# Altium PCB EVB_CBDR_AK376xE_V1.0.1.PcbDoc (part 2 of 2)
Units mil, origin at the board's own origin, x right, y up, seen from the top; angles counter-clockwise.
Board outline 1970 x 2130.01 mil, 4 copper layers (Top, Inner Layer 2, Inner Layer 3, Bottom), stack 35.4 mil thick; 164 components, 157 nets, 670 pads, 755 vias.
Unrouted connection lines stored in the file: 527.
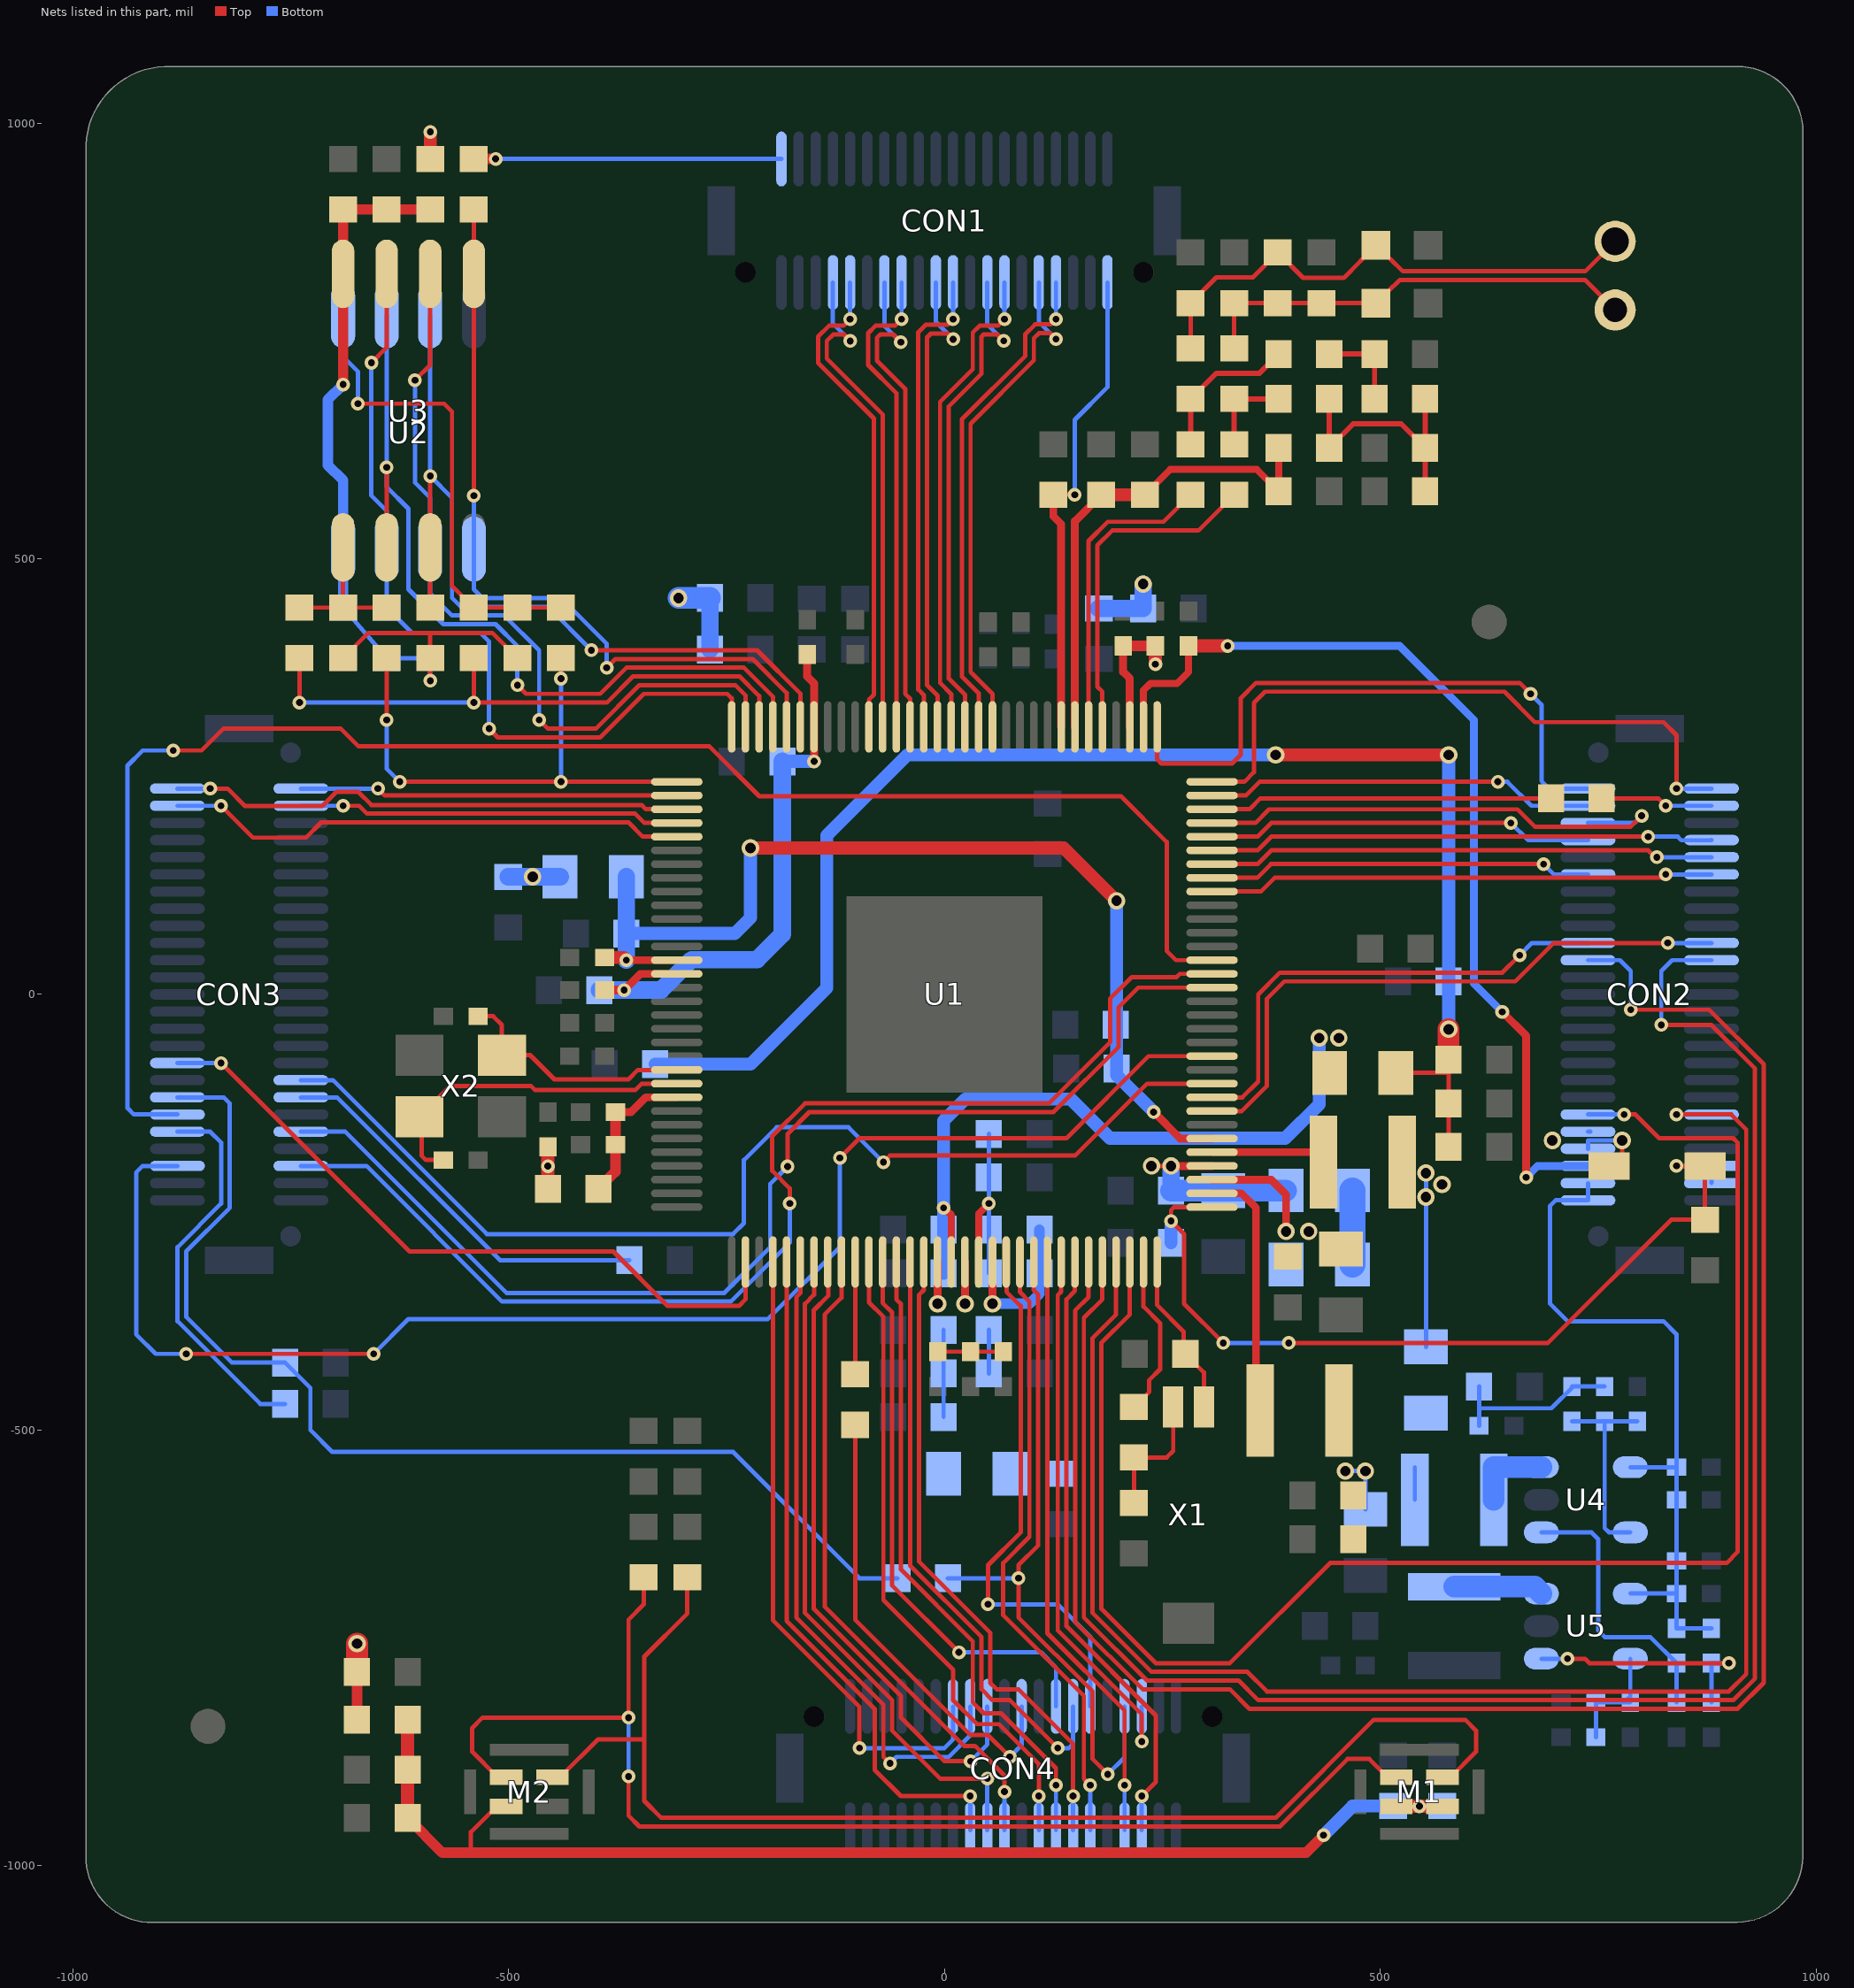
[diagram p3: the nets of this part, all layers, seen from the top]

## Via types
v1: diameter 15.75, hole 7.87, Top to Bottom, 695 vias
v2: diameter 20, hole 12, Top to Bottom, 60 vias

## Nets (pads, with @x,y where several pads share a name; then routed paths per layer and width w, separated by ;. In a path a pad name is that pad's centre, name@x,y a point inside that pad or via, vN(x,y) a via of type N, cw(c..) or ccw(c..) an arc to the next point about the centre after c; other vN are vias at no path point) (continued)
LCD_RST: CON3.33 U1.34 | length 813.3
  Top w5: v1(-830,-78.74) -613.74,-295 -380,-295 -317.5,-357.5 -235.85,-357.5 -228.35,-350 U1.34@-228.35,-307.09
  Bottom w5: CON3.33@-880.12,-78.74 -877.5,-78.74 v1(-830,-78.74)
LED_CON: CON3.36 U1.74 | length 1265.7
  Top w5: v1(-70,-192.5) -62.5,-185 150,-185 232.64,-102.36 U1.74@307.09,-102.36
  Bottom w5: CON3.36@-738.38,-98.43 -735,-98.43 -701.57,-98.43 -525,-275 -242.5,-275 -230,-262.5 -230,-190 -192.5,-152.5 -110,-152.5 v1(-70,-192.5)
LED_STATE: CON3.46 U1.82 | length 1395.1
  Top w5: v1(-177.5,-240) -177.5,-222.5 -197.5,-202.5 -197.5,-162.5 -160,-125 120,-125 190,-55 190,-5 215,20 266.38,20 270,23.62 U1.82@307.09,23.62
  Bottom w5: CON3.46@-738.38,-196.85 -663.15,-196.85 -507.5,-352.5 -245,-352.5 -177.5,-285 v1(-177.5,-240)
MIC_N: C19.1 U1.102 | length 352.4
  Top w5: U1.102@165.35,307.09 165.35,520.35 187.5,542.5 251.5,542.5 C19.1@282.5,573.5
MIC_P: C16.1 U1.101 | length 391.8
  Top w5: U1.101@181.1,307.09 181.1,347.5 175.5,353.1 175.5,515.5 192.5,532.5 291.5,532.5 C16.1@332.5,573.5
MIPI_DSI_TXDN0: CON1.8 U1.110 | length 573.3
  Top w5: U1.110@39.37,307.09 39.37,345.63 20,365 20,660 92.5,732.5 92.5,757.5 104,769 121.95,769 v1(127.95,775)
  Bottom w5: v1(127.95,775) CON1.8@127.95,817.12
MIPI_DSI_TXDN1: CON1.14 U1.112 | length 558.3
  Top w5: U1.112@7.87,307.09 7.87,344.63 -5,357.5 -5,680 32.5,717.5 32.5,759.63 40.37,767.5 61.4,767.5 v1(68.9,775)
  Bottom w5: v1(68.9,775) CON1.14@68.9,817.12
MIPI_DSI_TXDN2: CON1.20 U1.114 | length 543.7
  Top w5: U1.114@-23.62,307.09 -23.62,343.62 -30,350 -30,760 -21.5,768.5 3.34,768.5 v1(9.84,775)
  Bottom w5: v1(9.84,775) CON1.20@9.84,817.12
MIPI_DSI_TXDN3: CON1.26 U1.116 | length 552.4
  Top w5: U1.116@-55.12,307.09 -55.12,339.38 -55.12,690.12 -87.5,722.5 -87.5,759 -79,767.5 -56.71,767.5 v1(-49.21,775)
  Bottom w5: v1(-49.21,775) CON1.26@-49.21,817.12
MIPI_DSI_TXDN4: CON1.32 U1.118 | length 563.9
  Top w5: v1(-108.27,775) -115.77,767.5 -132.5,767.5 -145,755 -145,725 -81,661 -81,344 -86.61,338.39 U1.118@-86.61,307.09
  Bottom w5: v1(-108.27,775) CON1.32@-108.27,817.12
MIPI_DSI_TXDP0: CON1.10 U1.109 | length 590.1
  Top w5: U1.109@55.12,307.09 55.12,342.5 55.12,345 30,370.12 30,655 102.62,727.62 102.62,753 108.62,759 121.27,759 v1(128,752.27)
  Bottom w5: CON1.10@108.27,817.12 108.27,772 v1(128,752.27)
MIPI_DSI_TXDP1: CON1.16 U1.111 | length 575.4
  Top w5: U1.111@23.62,307.09 23.62,341.38 23.62,343.88 5,362.5 5,675 42.5,712.5 42.5,755 45,757.5 60.71,757.5 v1(68,750.21)
  Bottom w5: CON1.16@49.21,817.12 49.21,769 v1(68,750.21)
MIPI_DSI_TXDP2: CON1.22 U1.113 | length 559.8
  Top w5: U1.113@-7.87,307.09 -7.87,340.37 -7.87,342.87 -20,355 -20,754 -15.5,758.5 3.5,758.5 v1(10,752)
  Bottom w5: CON1.22@-9.84,817.12 -9.84,772 10,752.16 v1(10,752)
MIPI_DSI_TXDP3: CON1.28 U1.115 | length 571.4
  Top w5: v1(-50,748.6) -58.9,757.5 -73.5,757.5 -77.5,753.5 -77.5,727.5 -45,695 -45,345 -39.37,339.37 U1.115@-39.37,307.09
  Bottom w5: CON1.28@-68.9,817.12 -68.9,767.5 v1(-50,748.6)
MIPI_DSI_TXDP4: CON1.34 U1.117 | length 578.1
  Top w5: v1(-108,750) -115.5,757.5 -127.5,757.5 -135,750 -135,730 -70.87,665.87 U1.117@-70.87,307.09
  Bottom w5: CON1.34@-127.95,817.12 -127.95,769.95 v1(-108,750)
NETC9_1: C9.1 C10.1 C11.1 C12.1 FB3.2 M1.1 M1.2 M2.1 | length 1411.8
  Top w5: -543.27,-985 -543.27,-961.27 -513.73,-931.73 M2.1@-502.85,-931.73
  Top w12: C11.1@-616,-945 -576,-985 -543.27,-985 415,-985 v1(435,-965)
  Top w15: C11.1@-616,-945 C12.1@-616,-890 FB3.2@-616,-832.5 ; M1.1@518.43,-931.73 v1(545,-931.73) M1.2@571.57,-931.73
  Bottom w15: v1(435,-965) 468.5,-931.5 C10.1@515,-931.5
NETC14_1: C14.1 C15.1 C17.1 R5.1 R6.2 | length 294.8
  Top w6: R6.2@441.5,683.5 R5.1@441.5,627.5 469,655 524,655 C15.1@551.5,627.5 ; C14.1@551.5,577.5 C15.1@551.5,627.5 ; C17.1@551.5,683.5 C15.1@551.5,627.5
NETC16_2: C16.2 FB4.1 R6.1 | length 103
  Top w6: C16.2@332.5,631.5 FB4.1@332.5,683.5 R6.1@383.5,683.5
NETC17_2: C17.2 R7.1 R8.2 | length 103.5
  Top w6: R7.1@441.5,735 R8.2@493.5,735 C17.2@493.5,683.5
NETC18_1: C18.1 C20.1 C22.1 E1.1 FB4.2 MIC1.1 | length 514
  Top w5: FB4.2@332.5,741.5 C20.1@332.5,793.5 C18.1@382.5,793.5 C22.1@432.5,793.5 E1.1@495,793.5 522.5,820 735.16,820 MIC1.1@769.53,785.63
NETC18_2: C18.2 C21.1 E2.1 FB5.2 MIC1.2 | length 617.3
  Top w5: FB5.2@282.5,741.5 C21.1@282.5,793.5 312,823 354,823 C18.2@382.5,851.5 411.5,822.5 458.5,822.5 E2.1@495,860 526,830 735.16,830 MIC1.2@769.53,864.37
NETC19_2: C19.2 FB5.1 R7.2 | length 174.3
  Top w6: C19.2@282.5,631.5 FB5.1@282.5,683.5 312,713 361.5,713 R7.2@383.5,735
NETC41_1: C41.1 C48.1 R24.1 U1.67 | length 134.4
  Top w9: U1.67@307.09,-212.6 374.9,-212.6 ; 375,-212.5 374.9,-212.6 ; v2(392,-272) 392,-229.7 374.9,-212.6
  other v2: 418,-272
NETC42_1: C42.1 C43.1 R13.1 U1.68 | length 229.7
  Top w5: v2(237.5,-196.85) v2(260,-196.85)
  Top w9: v2(260,-196.85) U1.68@307.09,-196.85
  Bottom w20: C43.1@260,-225 v2(260,-196.85)
  Bottom w25: C43.1@260,-225 C42.1@320,-225 R13.1@392,-225
NETC69_1: C69.1 R31.1 X1.2 | length 150.7
  Top w5: C69.1@217.5,-583.5 R31.1@217.5,-531.5 255,-531.5 262.5,-524 262.5,-473.7 X1.2@262.28,-473.48
NETC87_1: C87.1 R37.1 U4.1 | length 323.7
  Bottom w5: U4.1@685,-617.4 742.4,-617.4 750,-625 750,-730 757.5,-737.5 810,-737.5 R37.1@840,-767.5 C87.1@840,-812.5
NETC90_1: C90.1 R38.1 U5.1 | length 282.1
  Top w5: v1(715,-762.4) 734.9,-762.4 740,-767.5 v1(900,-767.5)
  Bottom w5: U5.1@685,-762.4 v1(715,-762.4) ; C90.1@880,-812.5 R38.1@880,-767.5 v1(900,-767.5)
NETC92_2: C92.2 R41.1 R42.2 U4.5 | length 228.9
  Bottom w5: C92.2@720,-490 R41.1@757.5,-490 ; U4.5@786.97,-617.4 762.5,-617.4 757.5,-612.4 R41.1@757.5,-490 ; R42.2@795,-490 R41.1@757.5,-490
NETC93_2: C93.2 R39.2 R40.1 U5.5 | length 139.4
  Bottom w5: R40.1@747.5,-852.5 C93.2@747.5,-812.5 R39.2@786.97,-812.5 780,-812.5 786.97,-805.53 U5.5@786.97,-762.4
NETCON1_39: CON1.39 R4.1 | length 353.1
  Top w12: R4.1@-540,959 v1(-515,959)
  Bottom w5: v1(-515,959) -250,959 -249.86,958.86 CON1.39@-187.01,958.86
NETL3_1: L3.1 U4.3 | length 92.1
  Bottom w25: L3.1@630.28,-580 630.28,-542.6 U4.3@685,-542.6
NETL4_1: L4.1 U5.3 | length 103.3
  Bottom w25: L4.1@585,-679.72 677.12,-679.72 U5.3@685,-687.6
NETR2_2: R2.2 R25.1 R26.1 U2.1 | length 555
  Top w5: v1(-673,678) -574,678 -565,669 -565,469 R26.1@-540,444 R2.2@-490,444 R25.1@-440,444
  Bottom w5: U2.1@-690,778.86 -690,732 -673,715 v1(-673,678)
NETR19_2: R19.2 R27.1 R28.1 U3.1 | length 169
  Top w5: R27.1@-740,444 R19.2@-690,444 ; U3.1@-690,513 R19.2@-690,444 ; R28.1@-640,444 R19.2@-690,444
NETR35_1: R35.1 U1.42 | length 128.9
  Top w5: R35.1@-102.36,-436 U1.42@-102.36,-307.09
NETR36_2: R36.2 U1.94 | length 394.1
  Top w5: U1.94@307.09,212.6 350.1,212.6 362.5,225 R36.2@696,225
PDM_CLK: M1.3 M2.3 R20.1 | length 1489
  Top w5: M2.3@-449.71,-898.27 -448.94,-897.5 -440,-897.5 -397.5,-855 -344.5,-855 ; R20.1@-295,-669 -295,-710.5 -344.5,-760 -344.5,-855 ; M1.3@571.57,-898.27 580.73,-898.27 610,-869 610,-845 597.5,-832.5 492.5,-832.5 380,-945 -325,-945 -344.5,-925.5 -344.5,-855
PDM_DATA: M1.4 M2.4 R22.1 | length 1470.3
  Top w5: M2.4@-502.85,-898.27 -512.73,-898.27 -542,-869 -542,-842 -530,-830 v1(-362.5,-830) -362.5,-717.5 -345,-700 R22.1@-345,-669 ; v1(-362.5,-897.5) -362.5,-942.5 -350,-955 385,-955 462.5,-877.5 487.5,-877.5 508.27,-898.27 M1.4@518.43,-898.27
  Bottom w5: v1(-362.5,-897.5) v1(-362.5,-830)
RGB_VOGATE/MPU_RD: CON3.2 U1.2 | length 434.6
  Top w5: v1(-650,236.22) -642.13,228.35 U1.2@-307.09,228.35
  Bottom w5: CON3.2@-738.38,236.22 -735,236.22 v1(-650,236.22)
RGB_VOHSYNC/MPU_CS: CON3.4 U1.4 | length 439.5
  Top w5: v1(-690,216.54) -671.54,216.54 -662.5,207.5 -355,207.5 -344.35,196.85 U1.4@-307.09,196.85
  Bottom w5: CON3.4@-738.38,216.54 v1(-690,216.54)
RGB_VOPCLK/MPU_WR: CON3.3 U1.5 | length 602.2
  Top w5: v1(-830,216.54) -793.46,180 -732.5,180 -715,197.5 -362.5,197.5 -346.1,181.1 U1.5@-307.09,181.1
  Bottom w5: CON3.3@-880.12,216.54 -880,216.54 v1(-830,216.54)
RGB_VOVSYNC/MPU_A0: CON3.1 U1.3 | length 596.3
  Top w5: v1(-842.5,236.22) -822.5,236.22 -802.5,216.22 -713.78,216.22 -697.5,232.5 -672.5,232.5 -657.5,217.5 -387.6,217.5 -347.5,217.5 -342.6,212.6 U1.3@-307.09,212.6
  Bottom w5: CON3.1@-880.12,236.22 -875,236.22 v1(-842.5,236.22)
RMII0_50MCLK: CON4.22 R35.2 | length 529.7
  Top w5: R35.2@-102.36,-494 -102.36,-717.64 30,-850 50,-850 v1(75,-875)
  Bottom w5: v1(75,-875) 88.58,-861.42 CON4.22@88.58,-817.12
RMII0_MDC: CON4.15 U1.37 | length 785.6
  Top w5: U1.37@-181.1,-307.09 -181.1,-718.9 -80,-820 -80,-890 -50,-920 v1(29.53,-920)
  Bottom w5: CON4.15@29.53,-958.86 v1(29.53,-920)
RMII0_MDIO: CON4.14 U1.36 | length 748.5
  Top w5: U1.36@-196.85,-307.09 -196.85,-718.15 -97.5,-817.5 v1(-97.5,-865)
  Bottom w5: v1(-97.5,-865) 0,-865 9.84,-855.16 CON4.14@9.84,-817.12
RMII0_RST: CON2.11 U1.61 | length 1961.8
  Top w5: U1.61@196.85,-307.09 196.85,-367.5 170,-394.35 170,-710 237.5,-777.5 347.5,-777.5 370,-800 900,-800 920,-780 920,-155 902.8,-137.8 v1(840,-137.8)
  Bottom w5: v1(840,-137.8) CON2.11@880.12,-137.8
RMII0_RXD0: CON4.18 U1.40 | length 743
  Top w5: U1.40@-133.86,-307.09 -133.35,-307.6 -133.35,-345.85 -150,-362.5 -150,-705 -50,-805 -50,-830 0,-880 v1(30,-880)
  Bottom w5: v1(30,-880) 49.21,-860.79 CON4.18@49.21,-817.12
RMII0_RXD1: CON4.19 U1.41 | length 752.6
  Top w5: U1.41@-118.11,-307.09 -118.11,-348.11 -137.5,-367.5 -137.5,-702.5 22.5,-862.5 35,-862.5 68.9,-896.4 v1(68.9,-915)
  Bottom w5: CON4.19@68.9,-958.86 v1(68.9,-915)
RMII0_RXDV: CON4.17 U1.39 | length 774.5
  Top w5: U1.39@-149.61,-307.09 -149.61,-344.61 -160,-355 -160,-710 -60,-810 -60,-845 -5,-900 v1(49.21,-900)
  Bottom w5: CON4.17@49.21,-958.86 v1(49.21,-900)
RMII0_RXER: CON4.16 U1.38 | length 760.5
  Top w5: U1.38@-165.35,-307.09 -165.35,-342.85 -170,-347.5 -170,-715 -70,-815 -70,-875 v1(-62.5,-882.5)
  Bottom w5: v1(-62.5,-882.5) -55,-875 5,-875 29.53,-850.47 CON4.16@29.53,-817.12
RMII0_TXD0: CON4.23 U1.43 | length 747.1
  Top w5: U1.43@-86.61,-307.09 -86.61,-353.39 -70,-370 -70,-695 10,-775 10,-810 37.5,-837.5 62.5,-837.5 108.27,-883.27 v1(108.27,-920)
  Bottom w5: CON4.23@108.27,-958.86 v1(108.27,-920)
RMII0_TXD1: CON4.26 U1.44 | length 647.4
  Top w5: U1.44@-70.87,-307.09 -70.87,-354.13 -60,-365 -60,-678.37 v1(16.63,-755)
  Bottom w5: v1(16.63,-755) 110.45,-755 127.95,-772.5 CON4.26@127.95,-817.12
RMII0_TXEN: CON4.25 U1.45 | length 739.3
  Top w5: U1.45@-55.12,-307.09 -55.12,-349.88 -50,-355 -50,-659.88 32.5,-742.38 32.5,-812.5 45,-825 65,-825 127.95,-887.95 v1(127.95,-907.5)
  Bottom w5: CON4.25@127.95,-958.86 v1(127.95,-907.5)
RMII1_50MCLK/CSI0_D4: CON2.47 R36.1 | length 129.6
  Top w5: R36.1@754,225 819.04,225 v1(827.5,216.54)
  Bottom w5: v1(827.5,216.54) CON2.47@880.12,216.54
RMII1_MDC/CSI0_VSYNC/SD2_D0: CON2.40 U1.89 | length 442.7
  Top w5: U1.89@307.09,133.86 358.86,133.86 374.61,149.61 v1(687.5,149.61)
  Bottom w5: v1(687.5,149.61) 699.31,137.8 CON2.40@738.38,137.8
RMII1_MDIO/CSI0_HSYNC/SD2_D1: CON2.39 U1.88 | length 581.2
  Top w5: U1.88@307.09,118.11 363.11,118.11 378.86,133.86 823.56,133.86 v1(827.5,137.8)
  Bottom w5: v1(827.5,137.8) CON2.39@880.12,137.8
RMII1_RST: CON2.12 U1.62 | length 1875.1
  Top w5: U1.62@212.6,-307.09 212.6,-367.4 180,-400 180,-705 242.5,-767.5 327.5,-767.5 442.5,-652.5 897.5,-652.5 910,-640 910,-170 905,-165 820,-165 792.8,-137.8 v1(780,-137.8)
  Bottom w5: CON2.12@738.38,-137.8 742.5,-137.8 v1(780,-137.8)
RMII1_RXD0/CSI0_D2/SD2_D3: CON2.44 U1.92 | length 446
  Top w5: U1.92@307.09,181.1 359.25,181.1 375,196.85 v1(650,196.85)
  Bottom w5: v1(650,196.85) 669.69,177.17 CON2.44@738.38,177.17
RMII1_RXD1/CSI0_D3/SD2_D2: CON2.46 U1.93 | length 577.8
  Top w5: U1.93@307.09,196.85 356.85,196.85 372.5,212.5 657.5,212.5 677.5,192.5 787.5,192.5 v1(800,205)
  Bottom w5: CON2.46@738.38,196.85 791.85,196.85 v1(800,205)
RMII1_RXDV/CSI0_D1/SD2_CMD: CON2.43 U1.91 | length 581.2
  Top w5: U1.91@307.09,165.35 359.28,165.35 375,181.07 v1(807.5,181.07)
  Bottom w5: v1(807.5,181.07) 841.43,181.07 845.54,176.96 CON2.43@880.12,177.17
RMII1_RXER/CSI0_D0/SD2_CLK: CON2.41 U1.90 | length 582.8
  Top w5: U1.90@307.09,149.61 359.25,149.61 375,165.35 807.5,165.35 815.35,157.5 v1(817.5,157.48)
  Bottom w5: v1(817.5,157.48) CON2.41@880.12,157.48
RMII1_TXD0/CSI0_D5: CON2.48 U1.95 | length 449.2
  Top w5: U1.95@307.09,228.35 345.85,228.35 361.59,244.09 v1(635,244.09)
  Bottom w5: v1(635,244.09) 645.91,244.09 673.46,216.54 CON2.48@738.38,216.54
RMII1_TXD1/CSI0_D6: CON2.49 U1.96 | length 744.5
  Top w5: U1.96@307.09,244.09 344.09,244.09 355,255 355,334.59 367.91,347.5 642.5,347.5 677.5,312.5 825,312.5 840,297.5 v1(840,236.22)
  Bottom w5: v1(840,236.22) CON2.49@880.12,236.22
RMII1_TXEN/CSI0_D7: CON2.50 U1.97 | length 711.3
  Top w5: U1.97@244.09,307.09 244.09,270 249.09,265 330,265 340,275 340,340.01 357.49,357.5 660,357.5 v1(672.5,345)
  Bottom w5: v1(672.5,345) 685,332.5 685,245 693.74,236.26 CON2.50@738.38,236.22
SPI0_CS0: R26.2 R27.2 U1.126 | length 686.6
  Top w5: v1(-740,335) R27.2@-740,386 ; R26.2@-540,386 v1(-540,335) -387.5,335 -357.5,365 -235,365 -212.6,342.6 U1.126@-212.6,307.09
  Bottom w5: v1(-740,335) v1(-540,335)
SPI0_CS1: R25.2 R28.2 U1.1 | length 607.9
  Top w5: v1(-640,315) R28.2@-640,386 ; v1(-625,244.09) v1(-440,244.09) U1.1@-307.09,244.09 ; v1(-440,362.5) R25.2@-440,386
  Bottom w5: v1(-640,315) -640,259.09 v1(-625,244.09) ; v1(-440,244.09) v1(-440,362.5)
SPI0_DIN: U1.125 U2.2 U3.2 | length 971.4
  Top w5: U3.2@-640,513 v1(-640,605) ; v1(-490,355) -480,345 -395,345 -365,375 -230,375 -196.85,341.85 U1.125@-196.85,307.09
  Bottom w5: U2.2@-640,778.86 v1(-640,605) -640,582.5 -615,557.5 -615,465 -575,425 -515,425 -490,400 v1(-490,355)
SPI0_DOUT: R4.2 U1.124 U2.5 U3.5 | length 907.6
  Top w5: v1(-540,572.5) U3.5@-540,827 R4.2@-540,901 ; v1(-387.5,375) -377.5,385 -220,385 -181.1,346.1 U1.124@-181.1,307.09
  Bottom w5: v1(-540,572.5) U2.5@-540,511.14 -540,465 -530,455 -440,455 -387.5,402.5 v1(-387.5,375)
SPI0_HOLD: R3.2 U1.128 U2.7 U3.7 | length 969.4
  Top w5: v1(-657.5,725) -640,742.5 U3.7@-640,827 ; v1(-522.5,305) -512.5,295 -395,295 -345,345 -249.09,345 -244.09,340 U1.128@-244.09,307.09
  Bottom w5: v1(-657.5,725) -657.5,572.5 -640,555 U2.7@-640,511.14 R3.2@-640,444 -611,415 -532.5,415 -522.5,405 v1(-522.5,305)
SPI0_SCLK: U1.127 U2.6 U3.6 | length 916
  Top w5: v1(-607.5,705) -590,722.5 U3.6@-590,827 ; v1(-465,315) -455,305 -400,305 -350,355 -240,355 -228.35,343.35 U1.127@-228.35,307.09
  Bottom w5: v1(-607.5,705) -607.5,587.5 -590,570 U2.6@-590,511.14 -590,460 -565,435 -505,435 -465,395 v1(-465,315)
SPI0_WP: R1.2 U1.123 U2.3 U3.3 | length 968.5
  Top w5: R1.2@-590,444 U3.3@-590,513 v1(-590,595) ; v1(-405,395) -215,395 -165.35,345.35 U1.123@-165.35,307.09
  Bottom w5: U2.3@-590,778.86 v1(-590,595) -565,570 -565,455 -555,445 -455,445 v1(-405,395)
SPI_FLASH_3V3: C1.1 C2.2 C70.1 FB1.1 R1.1 R2.1 R3.1 R19.1 U2.8 U3.8 | length 997.2
  Top w5: R19.1@-690,386 -661,415 -590,415 ; v1(-590,360) R1.1@-590,386 -590,415 ; R2.1@-490,386 -519,415 -590,415
  Top w12: v1(-690,700) U3.8@-690,827 C70.1@-690,901 C1.1@-640,901 FB1.1@-590,901
  Bottom w5: C2.2@-690,444 R3.1@-640,386 -600,386 -590,376 v1(-590,360)
  Bottom w12: C2.2@-690,444 U2.8@-690,511.14 -690,590 -707.5,607.5 -707.5,682.5 v1(-690,700)
SPK_EN: CON3.45 U1.76 | length 1681.6
  Top w5: v1(-870,-412.5) v1(-655,-412.5) ; v1(-120,-187.5) -97.5,-165 140,-165 234.13,-70.87 U1.76@307.09,-70.87
  Bottom w5: CON3.45@-880.12,-196.85 -882.5,-196.85 -920,-196.85 -927.5,-204.35 -927.5,-390 -905,-412.5 v1(-870,-412.5) ; v1(-655,-412.5) -615,-372.5 -202.5,-372.5 -120,-290 v1(-120,-187.5)
SW11: L2.1 U1.69 | length 134.3
  Top w8.5: U1.69@307.09,-181.1 428.33,-181.1 L2.1@434.72,-192.5
SW18: L1.1 U1.66 | length 290.1
  Top w8.5: U1.66@307.09,-228.35 340.85,-228.35 357.5,-245 357.5,-435 L1.1@362.22,-477.5
TF_CLK: CON4.34 R17.2 U1.55 | length 808.6
  Top w5: U1.55@102.36,-307.09 102.36,-339.36 107.5,-344.5 107.5,-632.5 85,-655 v1(85,-670) 85,-715 170,-800 170,-877.5 v1(187.5,-895)
  Bottom w5: R17.2@4,-670 v1(85,-670) ; v1(187.5,-895) 206.69,-875.81 CON4.34@206.69,-817.12
TF_CMD: CON4.33 U1.56 | length 688.5
  Top w5: U1.56@118.11,-307.09 118.11,-733.11 206.69,-821.69 v1(206.69,-907.5)
  Bottom w5: CON4.33@206.69,-958.86 v1(206.69,-907.5)
TF_D0: CON4.29 U1.54 | length 710.1
  Top w5: U1.54@86.61,-307.09 86.61,-341.61 97.5,-352.5 97.5,-622.5 67.5,-652.5 67.5,-712.5 160,-805 160,-900.18 v1(167.32,-907.5)
  Bottom w5: CON4.29@167.32,-958.86 v1(167.32,-907.5)
TF_D1: CON4.30 U1.53 | length 627.9
  Top w5: v1(50,-700) 50,-655 87.5,-617.5 87.5,-357.5 71.25,-341.25 71.25,-307.47 U1.53@70.87,-307.09
  Bottom w5: v1(50,-700) 130,-700 167.32,-737.32 CON4.30@167.32,-817.12
TF_D2: CON4.35 U1.58 | length 704.9
  Top w5: U1.58@149.61,-307.09 149.61,-340.39 140,-350 140,-725 242.5,-827.5 242.5,-903.88 v1(226.38,-920)
  Bottom w5: CON4.35@226.38,-958.86 226.38,-955 v1(226.38,-920)
TF_D3: CON4.36 U1.57 | length 632.3
  Top w5: U1.57@133.86,-307.09 133.86,-341.14 130,-345 130,-730 226.38,-826.38 v1(226.38,-857.5)
  Bottom w5: v1(226.38,-857.5) CON4.36@226.38,-817.12
TF_DET: CON3.37 R17.1 R29.1 | length 1297.4
  Bottom w5: CON3.37@-880.12,-118.11 -877.5,-118.11 -826.89,-118.11 -820,-125 -820,-245 -870,-295 -870,-370 -817.5,-422.5 R29.1@-756.5,-422.5 -727.5,-451.5 -727.5,-500 -702.5,-525 -242.5,-525 -97.5,-670 R17.1@-54,-670
TF_EN: CON3.39 U1.83 | length 1898.7
  Top w5: v1(-885,280) -852.5,280 -827.5,305 -692.5,305 -672.5,285 -270,285 -212.5,227.5 202.5,227.5 255,175 255,50 265.63,39.37 U1.83@307.09,39.37
  Bottom w5: v1(-885,280) -920,280 -937.5,262.5 -937.5,-130.3 -930,-137.8 CON3.39@-880.12,-137.8
TS_INT: CON2.32 U1.73 | length 563.3
  Top w5: U1.73@307.09,-118.11 341.89,-118.11 360,-100 360,0 385,25 640,25 v1(660,45)
  Bottom w5: v1(660,45) 674.06,59.06 CON2.32@738.38,59.06
TS_RST: CON2.31 U1.72 | length 720.1
  Top w5: U1.72@307.09,-133.86 341.14,-133.86 370,-105 370,-5 390,15 655,15 699.06,59.06 832.5,59.06 830,56.56 v1(830,59.06)
  Bottom w5: v1(830,59.06) CON2.31@880.12,59.06
TS_SCL: CON2.30 U1.59 | length 2250.2
  Top w5: U1.59@165.35,-307.09 165.35,-347.5 150,-362.85 150,-720 227.5,-797.5 327.5,-797.5 350,-820 910,-820 940,-790 940,-80 877.5,-17.5 v1(787.5,-17.5)
  Bottom w5: CON2.30@738.38,39.37 775,39.37 787.5,26.87 v1(787.5,-17.5)
TS_SDA: CON2.29 U1.60 | length 2189.2
  Top w5: U1.60@181.1,-307.09 181.1,-350 160,-371.1 160,-715 232.5,-787.5 337.5,-787.5 360,-810 905,-810 930,-785 930,-85 880,-35 v1(822.5,-35)
  Bottom w5: v1(822.5,-35) 822.5,26.87 835,39.37 CON2.29@880.12,39.37
UART0_RXD: CON4.27 U1.47 | length 741.8
  Top w5: U1.47@-23.62,-307.09 -23.62,-339.12 -29,-344.5 -29,-651 52.5,-732.5 52.5,-790 60,-797.5 85,-797.5 147.64,-860.14 v1(147.64,-920)
  Bottom w5: CON4.27@147.64,-958.86 v1(147.64,-920)
UART0_TXD: CON4.28 U1.46 | length 702.4
  Top w5: U1.46@-39.37,-307.09 -39.37,-655.63 42.5,-737.5 42.5,-797.5 55,-810 75,-810 v1(130,-865)
  Bottom w5: v1(130,-865) 142.64,-865 147.64,-860 CON4.28@147.64,-817.12
VCC_3V6: C84.1 C85.1 C86.1 C89.1 CON2.2 CON2.4 R37.2 R38.2 U4.4 U5.4 | length 821.2
  Bottom w5: CON2.4@738.38,-216.54 CON2.2@738.38,-236.22 701.28,-236.22 695,-242.5 695,-355 715,-375 825,-375 840,-390 C86.1@840,-542.6 ; U5.4@786.97,-687.6 C85.1@840,-687.6 ; U4.4@786.97,-542.6 C86.1@840,-542.6 ; R38.2@880,-727.5 R37.2@840,-727.5 C85.1@840,-687.6 ; C85.1@840,-687.6 C84.1@840,-650 C89.1@840,-580 C86.1@840,-542.6
VCC_RTC: C51.1 C52.1 CON2.3 CON2.5 D1.K U1.65 | length 1019.7
  Top w5: U1.65@307.09,-244.09 263.41,-244.09 260,-247.5 v1(260,-260) 275,-275 275,-355 v1(320,-400) ; v1(395,-400) 692.5,-400 834,-258.5 C51.1@872.62,-258.5 D1.K@872.62,-196.85 865.12,-201.85 860.12,-196.85 v1(840,-196.85)
  Bottom w5: v1(320,-400) v1(395,-400) ; v1(840,-196.85) CON2.5@880.12,-196.85 880.12,-215 CON2.3@880.12,-216.54
  Bottom w15: C52.1@260,-285 v1(260,-260)
VCM3: C13.1 C65.1 C66.1 R5.2 U1.103 | length 554.9
  Top w8: C66.1@230,573.5 259,602.5 358.5,602.5 C13.1@383.5,577.5 R5.2@383.5,627.5
  Top w9: U1.103@149.61,307.09 149.61,543.11 C65.1@180,573.5
  Top w15: C65.1@180,573.5 C66.1@230,573.5
VCM_RESET: C50.1 CON1.2 U1.104 | length 553.7
  Top w5: C50.1@125,573.5 v1(149.5,573.5)
  Top w9: C50.1@125,573.5 125,548.86 133.86,540 U1.104@133.86,307.09
  Bottom w5: v1(149.5,573.5) 149.5,659.5 187.01,697.01 CON1.2@187.01,817.12
VDD: C88.1 C92.1 C94.1 L3.2 R41.2 R43.2 | length 237.9
  Bottom w5: L3.2@539.72,-580 L3.2@539.72,-542.78 ; C88.1@613.5,-495 613.5,-475 ; C94.1@613.5,-450 613.5,-475 ; C92.1@720,-450 C92.1@721.32,-450 ; R41.2@757.5,-450 C92.1@721.32,-450 ; 613.5,-475 696.32,-475 C92.1@721.32,-450
VDD_1V1: C36.2 C46.1 C47.1 C53.1 FB6.1 L2.2 R11.1 R43.1 | length 1870.1
  Top w5: R11.1@518,-90 C53.1@578.5,-90 ; C47.1@578.5,-175 C36.2@578.5,-125 C53.1@578.5,-90 ; C53.1@578.5,-75 C53.1@578.5,-90
  Top w15: v2(380,275) v2(578.5,275)
  Top w25: C53.1@578.5,-75 v2(578.5,-40)
  Bottom w5: R43.1@552.5,-404.5 v2(552.5,-232.5) v2(552.5,-205)
  Bottom w15: FB6.1@-332,-80 -222.5,-80 -135,7.5 -135,182.5 -42.5,275 v2(380,275) ; v2(578.5,-40) C46.1@578.5,15 v2(578.5,275)
  other v2: 571,-218
VDD_1V8: C28.2 C44.1 C45.1 L1.2 R10.1 R44.1 | length 67
  Bottom w5: v2(460,-547) v2(483,-547) R44.1@483,-591
VDD_3V3: C5.2 C8.1 C40.2 C56.1 C59.1 CON2.8 CON2.10 D1.A FB1.2 FB2.1 FB3.1 FB7.1 FB8.1 R12.1 R13.2 R24.2 | length 580.9
  Top w5: D1.A@762.38,-196.85 777.5,-196.85 v2(777.5,-167.5)
  Top w12: FB3.1@-674,-832.5 C8.1@-674,-777.5
  Top w15: FB1.2@-590,959 v1(-590,990) ; FB7.1@-455,-223 v1(-455,-197) C40.2@-455,-175
  Top w25: C8.1@-674,-777.5 v2(-674,-745)
  Bottom w5: CON2.8@738.38,-177.17 738.38,-167.5 v2(777.5,-167.5) ; CON2.10@738.38,-157.48 CON2.10@741,-157.48
  Bottom w20: C59.1@-500.5,135 v2(-472.5,135) R12.1@-441,135 ; FB8.1@-269,396 C5.2@-269,455 ; FB2.1@177,443 C56.1@228,443 v2(228,471)
  Bottom w25: v2(-305,455) C5.2@-269,455
  Bottom w30: R24.2@468,-310 R13.2@468,-225
  other v2: 697.5,-167.5
VDD_CPU: C29.2 C30.2 C31.2 C32.2 C33.2 C34.2 C35.2 C75.2 R11.2 U1.15 U1.49 U1.99 U1.122 | length 1647.6
  Top w5: R11.2@442,-102.5 R11.2@442,-90
  Top w8.5: v1(-1,-245) 7.87,-253 U1.49@7.87,-307.09
  Top w9: v1(-367.5,5) -348.88,23.62 U1.15@-307.09,23.62 ; C75.2@-157.5,390 -157.5,364.9 -149.61,357.16 U1.122@-149.61,307.09 v1(-149.61,267.5) ; C33.2@205,400 205,370.2 212.6,362.6 U1.99@212.6,307.09
  Top w10: C31.2@-390,5 v1(-367.5,5)
  Top w12: C33.2@205,400 C34.2@242,400
  Top w15: v1(242,379) C34.2@242,400
  Bottom w15: C29.2@-186,267.5 v1(-149.61,267.5) ; C35.2@-1,-320 C32.2@-1,-270 v1(-1,-245) -1,-145 24,-120 145,-120 190,-165 391,-165 430,-126 v2(430,-50)
  Bottom w20: C30.2@-396,5 v1(-367.5,5) -325,5 -290,40 -215,40 -186,69 C29.2@-186,267.5
  other v2: 452.5,-50
VDDIO: C37.2 C38.2 C39.2 C72.1 R12.2 U1.14 U1.70 | length 1194.6
  Top w9: v1(-365,39.37) U1.14@-307.09,39.37 ; v1(240,-135) 270.35,-165.35 U1.70@307.09,-165.35
  Top w15: C38.2@-390,42.5 -368.13,42.5 v1(-365,39.37) ; v2(-222.5,168) 137,168 v2(197.5,107.5)
  Bottom w15: C37.2@-365,70 -240.5,70 -222.5,88 v2(-222.5,168) ; v2(197.5,107.5) C72.1@197.5,-85 197.5,-92.5 v1(240,-135)
  Bottom w20: v1(-365,39.37) C37.2@-365,70 R12.2@-365,135
VDDIO_CSI0: C71.1 CON2.6 U1.98 | length 1121.2
  Top w8: U1.98@228.35,307.09 228.35,349 236.35,357 267,357 280,370 C71.1@280,400
  Top w9: v1(640,-20) 667.5,-47.5 v1(667.5,-210)
  Top w15: C71.1@280,400 v1(325,400)
  Bottom w9: v1(325,400) 522.5,400 607.5,315 607.5,12.5 v1(640,-20) ; v1(667.5,-210) 680.65,-196.85 CON2.6@738.38,-196.85
VDDIO_DDR: C23.2 C24.2 C25.2 C26.2 C27.2 C49.1 C62.1 C73.1 C74.1 R10.2 R14.2 U1.48 U1.50 U1.52 | length 500.9
  Top w5: C74.1@-7.5,-410 C73.1@30,-410 C49.1@67.5,-410
  Top w9: v2(-7.87,-355) U1.48@-7.87,-307.09 ; v2(23.62,-355) U1.50@23.62,-307.09 ; v2(55.12,-355) U1.52@55.12,-307.09
  Bottom w5: C25.2@-1,-485 C26.2@-1,-435 C24.2@-1,-385 ; C27.2@51,-435 C23.2@51,-385
  Bottom w12: v2(55.12,-355) 97.5,-355 109,-343.5 C62.1@109,-320 R14.2@109,-270
VDDIO_OSC: C57.1 C58.1 FB7.2 U1.24 | length 173.5
  Top w9: C57.1@-377.5,-135 -359.39,-135 -342.5,-118.11 U1.24@-307.09,-118.11
  Top w12: FB7.2@-397,-223 -377.5,-203.5 C58.1@-377.5,-172.5 C57.1@-377.5,-135
VREF_DDR: C62.2 C64.1 R14.1 R16.2 U1.51 | length 231.9
  Top w8: U1.51@39.37,-307.09 39.37,-251.63 v1(51,-240)
  Bottom w5: C62.2@51,-320 R14.1@51,-270 v1(51,-240) C64.1@51,-210 R16.2@51,-160
WIFI_EN: CON3.42 U1.81 | length 1358.3
  Top w5: v1(-180,-197.5) -180,-160 -155,-135 125,-135 200,-60 200,-14.63 222.5,7.87 U1.81@307.09,7.87
  Bottom w5: CON3.42@-738.38,-157.48 -687.52,-157.48 -502.5,-342.5 -252.5,-342.5 -200,-290 -200,-217.5 v1(-180,-197.5)
WIFI_INT: CON3.41 R30.1 | length 443.9
  Bottom w5: CON3.41@-880.12,-157.48 -877.5,-157.48 -842.5,-157.48 -830,-169.98 -830,-240 -880,-290 -880,-375 -785,-470 R30.1@-756.5,-470
WIFI_RST: CON3.38 R32.1 | length 454.3
  Bottom w5: CON3.38@-738.38,-118.11 -696.89,-118.11 -510,-305 R32.1@-361.5,-305
XCLK24M_XI: C63.1 U1.22 X2.3 | length 282.7
  Top w5: C63.1@-535,-25 -517.76,-25 -507.76,-35 X2.3@-507.76,-69.57 -475.43,-69.57 -447.5,-97.5 -362.5,-97.5 -351.61,-86.61 U1.22@-307.09,-86.61
XCLK24M_XO: C67.1 U1.23 X2.1 | length 387.2
  Top w5: C67.1@-575,-190 -595,-190 -600,-185 -600,-142.67 X2.1@-602.24,-140.43 -566.81,-105 -474.5,-105 -470,-109.5 -354.5,-109.5 -347.36,-102.36 U1.23@-307.09,-102.36
XCLK32K_XI: C68.1 U1.64 X1.1 | length 188.6
  Top w5: U1.64@244.09,-307.09 244.09,-356.59 274.5,-387 274.5,-410.5 C68.1@276.5,-412.5 297.72,-433.72 X1.1@297.72,-473.48
XCLK32K_XO: R31.2 U1.63 | length 186.8
  Top w5: R31.2@217.5,-473.5 235,-456 235,-442.5 247.5,-430 247.5,-377.5 228.35,-358.35 U1.63@228.35,-307.09
pads on no net: CON1.5 CON1.7 CON1.11 CON1.13 CON1.15 CON1.19 CON1.21 CON1.25 CON1.27 CON1.31 CON1.33 CON1.37 CON1.41 CON1.42 CON1.43 CON1.44 CON2.1 CON2.9 CON2.15 CON2.16 CON2.17 CON2.18 CON2.19 CON2.20 CON2.21 CON2.22 CON2.23 CON2.24 CON2.25 CON2.26 CON2.51 CON2.52 CON2.53 CON2.54 CON3.35 CON3.47 CON3.48 CON3.49 CON3.50 CON3.51 CON3.52 CON3.53 CON3.54 CON4.1 CON4.2 CON4.3 CON4.4 CON4.5 CON4.6 CON4.7 CON4.8 CON4.9 CON4.10 CON4.37 CON4.38 CON4.39 CON4.40 CON4.41 CON4.42 CON4.43 CON4.44 M3.1 M4.1 M6.1 M7.1
copper on no net: | length 32.5
  Inner Layer 3 w6: -107.11,-900.34 -100.88,-900.34 ; -85.43,-933.43 -72.87,-920.87 -72.87,-912.39

## Polygon pours and split planes (outlines as drawn)
GND on Bottom (solid, remove dead copper, pour order 3): -970,-990 -970.01,-989.96 -969.14,-994.82 -967.94,-999.61 -966.4,-1004.3 -964.55,-1008.87 -962.38,-1013.31 -959.9,-1017.58 -957.13,-1021.66 -954.09,-1025.55 -950.78,-1029.21 -947.22,-1032.63 -943.44,-1035.8 -939.44,-1038.69 -935.25,-1041.3 -930.89,-1043.61 -926.37,-1045.61 -921.73,-1047.29 -916.99,-1048.64 -912.16,-1049.66 -910.09,-1049.99 905,-1050 904.97,-1050 909.74,-1049.59 914.47,-1048.85 919.14,-1047.78 923.72,-1046.39 928.19,-1044.68 932.53,-1042.67 936.72,-1040.35 940.74,-1037.75 944.57,-1034.88 948.19,-1031.74 951.58,-1028.37 954.73,-1024.76 957.62,-1020.94 960.23,-1016.93 962.56,-1012.75 964.59,-1008.41 966.31,-1003.94 967.72,-999.37 968.81,-994.7 969.56,-989.98 969.99,-985.21 970,-984.97 970,975 970,974.94 969.7,980.28 969.03,985.59 967.99,990.84 966.59,996.01 964.83,1001.06 962.72,1005.98 960.27,1010.74 957.5,1015.32 954.42,1019.7 951.03,1023.84 947.37,1027.75 943.44,1031.38 939.27,1034.74 934.87,1037.79 930.28,1040.53 925.5,1042.95 920.56,1045.02 915.5,1046.75 910.32,1048.11 905.07,1049.12 899.75,1049.75 895.07,1050 -895,1050 -895.06,1050 -900.53,1049.56 -905.95,1048.74 -911.31,1047.54 -916.56,1045.97 -921.7,1044.04 -926.68,1041.76 -931.5,1039.14 -936.12,1036.18 -940.52,1032.91 -944.69,1029.34 -948.59,1025.49 -952.22,1021.38 -955.55,1017.02 -958.57,1012.44 -961.26,1007.66 -963.62,1002.71 -965.62,997.6 -967.26,992.37 -968.53,987.03 -969.42,981.62 -969.94,976.16 -970,974.93
AGND on Bottom (solid, remove dead copper, pour order 0): 260,1035 260,550 955,550 955,985 905,1035
GND on Top (solid, remove dead copper, pour order 5): -970,-990 -969.99,-990.06 -969.21,-994.83 -968.1,-999.54 -966.66,-1004.16 -964.9,-1008.66 -962.84,-1013.04 -960.47,-1017.26 -957.81,-1021.3 -954.88,-1025.15 -951.69,-1028.78 -948.25,-1032.18 -944.58,-1035.34 -940.7,-1038.23 -936.63,-1040.84 -932.39,-1043.16 -928,-1045.19 -923.47,-1046.9 -918.84,-1048.29 -914.12,-1049.35 -909.94,-1050.01 905,-1050 904.98,-1050 909.68,-1049.66 914.35,-1049 918.96,-1048.01 923.49,-1046.7 927.91,-1045.08 932.22,-1043.16 936.38,-1040.94 940.37,-1038.43 944.18,-1035.65 947.78,-1032.62 951.17,-1029.34 954.32,-1025.83 957.22,-1022.11 959.84,-1018.19 962.2,-1014.11 964.25,-1009.87 966.01,-1005.49 967.46,-1001 968.59,-996.43 969.41,-991.78 969.89,-987.09 970,-984.98 970,975 969.99,975.04 968.98,981.05 967.55,986.97 965.71,992.77 963.46,998.43 960.83,1003.93 957.82,1009.22 954.45,1014.3 950.74,1019.12 946.69,1023.68 942.34,1027.94 937.7,1031.89 932.8,1035.5 927.66,1038.76 922.3,1041.66 916.75,1044.18 911.04,1046.3 905.2,1048.02 899.25,1049.33 894.89,1050.01 -895,1050 -894.98,1050 -900.79,1049.21 -906.52,1048.01 -912.16,1046.41 -917.67,1044.43 -923.03,1042.07 -928.21,1039.33 -933.19,1036.25 -937.94,1032.82 -942.44,1029.07 -946.67,1025.01 -950.61,1020.67 -954.23,1016.07 -957.52,1011.23 -960.47,1006.16 -963.06,1000.91 -965.27,995.48 -967.1,989.92 -968.54,984.24 -969.57,978.47 -970,974.98
AGND on Top (solid, remove dead copper, pour order 1): 260,1035 260,550 955,550 955,985 905,1035
GND on Inner Layer 2 (solid, remove dead copper, pour order 6): -970,-990 -970,-989.98 -969.89,-994.13 -969.49,-998.27 -968.81,-1002.36 -967.84,-1006.4 -966.59,-1010.36 -965.07,-1014.23 -963.28,-1017.97 -961.23,-1021.59 -958.94,-1025.05 -956.41,-1028.35 -953.66,-1031.46 -950.7,-1034.37 -947.54,-1037.07 -944.2,-1039.54 -940.7,-1041.77 -937.05,-1043.75 -933.27,-1045.47 -929.38,-1046.93 -925.4,-1048.11 -921.34,-1049.01 -917.24,-1049.62 -913.1,-1049.95 -909.98,-1050 905,-1050 904.97,-1050 909.74,-1049.59 914.47,-1048.85 919.14,-1047.78 923.72,-1046.39 928.19,-1044.68 932.53,-1042.67 936.72,-1040.35 940.74,-1037.75 944.57,-1034.88 948.19,-1031.74 951.58,-1028.37 954.73,-1024.76 957.62,-1020.94 960.23,-1016.93 962.56,-1012.75 964.59,-1008.41 966.31,-1003.94 967.72,-999.37 968.81,-994.7 969.56,-989.98 969.99,-985.21 970,-985.09 970,975 970.01,974.95 968.92,981.03 967.42,987.01 965.5,992.88 963.18,998.59 960.47,1004.13 957.38,1009.47 953.92,1014.58 950.11,1019.43 945.97,1024.01 941.53,1028.29 936.8,1032.25 931.8,1035.86 926.56,1039.12 921.11,1042.01 915.47,1044.51 909.67,1046.61 903.73,1048.3 897.7,1049.57 895.11,1049.98 -895,1050 -895.06,1050 -900.53,1049.56 -905.95,1048.74 -911.31,1047.54 -916.56,1045.97 -921.7,1044.04 -926.68,1041.76 -931.5,1039.14 -936.12,1036.18 -940.52,1032.91 -944.69,1029.34 -948.59,1025.49 -952.22,1021.38 -955.55,1017.02 -958.57,1012.44 -961.26,1007.66 -963.62,1002.71 -965.62,997.6 -967.26,992.37 -968.53,987.03 -969.42,981.62 -969.94,976.16 -970,974.93
AGND on Inner Layer 2 (solid, remove dead copper, pour order 2): 260,1035 260,550 955,550 955,985 905,1035
AGND on Inner Layer 3 (solid, remove dead copper, pour order 7): 260,1035 260,550 955,550 955,985 905,1035
VDD_3V3 on Inner Layer 3 (solid, remove dead copper, pour order 4): -895,1035 -955,975 -955,-995 -915,-1035 905,-1035 955,-985 955,985 905,1035

## Keep-outs
Top:
  region: -270,255 -345,255 -345,-255 -270,-255 -270,255
  region: 377.5,-422.5 377.5,-532.5 437.5,-532.5 437.5,-422.5 377.5,-422.5
  region: 250,-270 -250,-270 -255,-275 -255,-345 255,-345 255,-275 250,-270
  region: 515,-137.5 455,-137.5 455,-247.5 515,-247.5 515,-137.5
  region: 342.5,255 272.5,255 272.5,-255 342.5,-255 342.5,255
  region: 255,345 -255,345 -255,272.5 255,272.5 255,345
Bottom:
  region: 530,-755 640,-755 640,-695 530,-695 530,-755
  region: 410,-195 452.5,-195 452.5,-340 410,-340 410,-195
  region: 555,-522.5 555,-632.5 615,-632.5 615,-522.5 555,-522.5
Keep-Out Layer:
  lines w8: -985,-995 -985,975 cw(c-891.07,971.07) -895.01,1065 910,1065 cw(c910,990) 985,990 985,-990 ; -985,-995.04 ccw(c-909.5,-989.5) -914.91,-1065.01 ; -915,-1065 910,-1065 ; 909.94,-1065 ccw(c908.33,-988.33) 985,-990.07

## Other copper
Top:
  region net SW11: 335,-185 365,-155 410,-155 380,-185 335,-185
  region net VDDIO_DDR: -15,-345 -20,-350 -20,-422.5 77.5,-422.5 77.5,-362.5 60,-345 -15,-345
  region net NETC41_1: 377.5,-235 377.5,-320 480,-320 480,-270 470,-260 415,-260 405,-250 405,-220 395,-210 350,-210 377.5,-235
  region net NETC42_1: 272.5,-192.5 265,-185 230,-185 225,-190 225,-205 230,-210 265,-210 272.5,-202.5 272.5,-192.5
  region net NETC41_1: 340,-215 355,-200 385,-200 405,-220 405,-240 380,-215 340,-215
  region net VDD_1V8: 437,-420 495,-420 495,-641 437,-641 437,-420
  region net VDD_CPU: 465,-35 417.5,-35 417.5,-120 465,-120 465,-35
  region net VDDIO_DDR: 59,-345 59,-365 -13,-365 -13,-345 59,-345
  region net AGND: 255,615 105,615 105,660 113,668 143,668 152.5,677.5 152.5,827.5 135,845 135,870 140,875 195,875 200,870 200,815 210,805 255,805 255,615
  region net SW18: 354,-224 370,-240 370,-530 345,-530 345,-235 334,-224 354,-224
  region net VDD_1V1: 497.5,-60 595,-60 595,-245 512.5,-245 512.5,-135 560,-135 560,-115 497.5,-115 497.5,-60
  region net AVDD_PLL: -400,-25 -380,-25 -380,-80 -400,-80 -400,-25
  region net SW11: 455,-140 410,-140 367.5,-182.5 425,-182.5 425,-245 455,-245 455,-140
Bottom:
  region net VDDIO_DDR: 67,-344 -18,-344 -18,-451 67,-451 67,-344
  region net NETC41_1: 370,-260 430,-260 430,-335 370,-335 370,-260
  region net DDR: 470,-650 500,-650 500,-785 470,-785 470,-650
  region net VDD_CPU: -17.5,330 -70,330 -115,285 -195,285 -195,245 -102.5,245 -17.5,330
  region net DDR: 630,-755 470,-755 470,-785 630,-785 630,-755
  region net AVCC33_MIPI_DSI: 85,395 85,360 100,360 100,395 85,395
  region net VDD_CPU: 462.5,292.5 425,330 387.5,330 387.5,295 405,295 420,280 420,-65 462.5,-65 462.5,292.5
  region net VDD_1V8: 508,-535 60,-535 60,-565 508,-565 508,-535
  region net VDD_1V1: 585,-192.5 522.5,-192.5 522.5,-425 585,-425 585,-192.5
  region net AGND: 60,505 55,500 55,480 60,475 100,475 105,470 105,435 80,435 80,415 132.5,415 132.5,667.5 130,670 120,670 115,675 115,690 130,705 150,705 155,710 155,735 125,735 60,670 60,505
  region net VREF_DDR: 40,-145 61,-145 61,-334 40,-334 40,-145
  region net VDD_CPU: 232.5,390 252.5,390 252.5,300 232.5,300 232.5,390
  region net NETC9_1: 495,-915 590,-915 590,-950 495,-950 495,-915
  region net AVCC33_MIPI_DSI: 80,395 190,395 190,375 80,375 80,395
  region net VDD: 630,-435 525,-435 525,-630 555,-630 555,-505 630,-505 630,-435
  region net VDD_CPU: -72.5,330 420,330 455,295 -72.5,295 -72.5,330
  region net VCC_3V6: 770,-210.75 704.25,-210.75 680,-235 680,-375 710,-405 810,-405 825,-420 825,-530 775,-530 775,-555 825,-555 825,-675 780,-675 780,-700 855,-700 855,-395 825,-365 735,-365 715,-345 715,-255 725,-245 770,-245 770,-210.75
  region net VDD_3V3: 787.5,-151.5 478.5,-151.5 450,-180 450,-240 485,-240 485,-195 497,-183 787.5,-183 787.5,-151.5
  region net VDDIO_DDR: -18,-432 15,-432 15,-566 -18,-566 -18,-432
  region net NETC42_1: 230,-185 225,-190 225,-236 230,-241 410,-241 410,-200 285,-200 270,-185 230,-185
  region net VDD_1V8: 442,-535 508,-535 508,-612 442,-612 442,-535
Multi-Layer:
  lines w8: -1335,1065 -940,1065 ; -985,1135 -985,3105 cw(c-891.07,3101.07) -895.01,3195 910,3195 cw(c910,3120) 985,3120 985,1140 ; -985,1134.96 ccw(c-909.5,1140.5) -914.91,1064.99 ; -915,1065 910,1065 ; 909.94,1065 ccw(c908.33,1141.67) 985,1139.93 ; 985,-995 985,975 cw(c1078.93,971.07) 1074.99,1065 2880,1065 ; 985,1135 985,3105 cw(c1078.93,3101.07) 1074.99,3195 2880,3195 cw(c2880,3120) 2955,3120 2955,1140 ; 985,-995.04 ccw(c1060.5,-989.5) 1055.09,-1065.01 ; 985,1134.96 ccw(c1060.5,1140.5) 1055.09,1064.99 ; 1055,-1065 2880,-1065 ; 1055,1065 2880,1065 ; 2879.94,-1065 ccw(c2878.33,-988.33) 2955,-990.07 ; 2879.94,1065 ccw(c2878.33,1141.67) 2955,1139.93 ; 2915,1065 3250,1065 ; 2955,-990 2955,990 ccw(c2880,990) 2880,1065 ; -1185,-1065 -985,-1065 -985,3195 -1185,3195 -1185,-1065 ; 2955,-1065 3155,-1065 3155,3195 2955,3195 2955,-1065

## Silkscreen, mask and mechanical layers (free items; w line width, h text height)
Silkscreen Top:
  region: -769.84,910 ccw(c-850,910) -850,990.16 ccw(c-850,910) -930.16,910 ccw(c-850,910) -850,829.84 ccw(c-850,910)
  text "EVB_CBDR_AK3760E_V1.0.1" at -350,-1027.5 h15
  text "PBA37E6A2XX 2020/11/9" at 25,-1030 h15